# EAGLE board d11_micro_std_vcp_v2 (EAGLE 7.3.0)
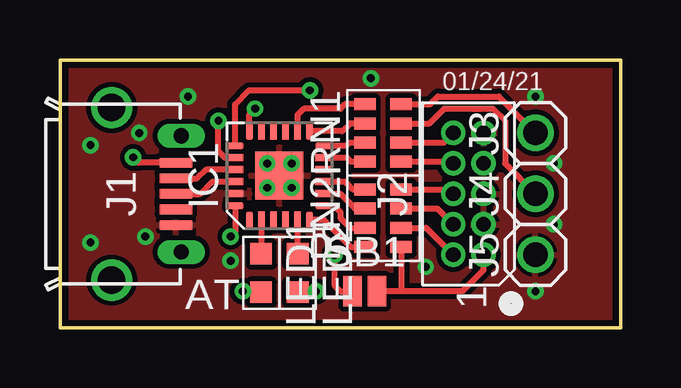
[diagram p0: board, top side]
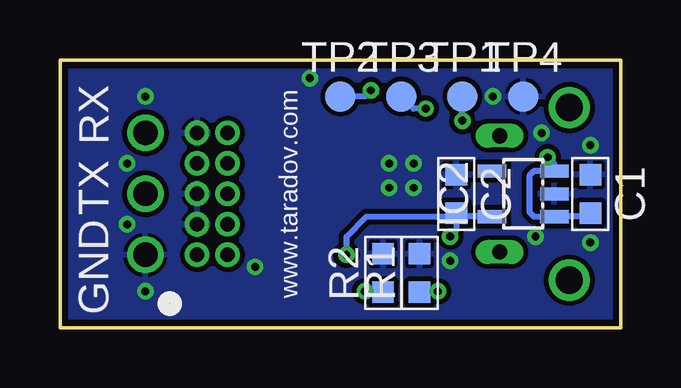
[diagram p1: board, bottom side, seen from below]

Size 23.37 x 11.18 mm. Coordinates in mm from the lower left corner, seen from the top.
Outline: 0,0 23.37,0 23.37,11.18 0,11.18 0,0
Copper layers (1*16): Top 0.0356mm / dielectric 1.5011mm / Bottom 0.0356mm
Design rules "std-tented-new": minimum track width 8mil, minimum drill 13mil, track to track 6mil, track to pad 6mil, pad to pad 6mil, via to via 6mil, smd to smd 0mil, copper to edge 10mil, drill to drill 6mil, minimum pad ring 7mil, minimum via ring 7mil, stop-mask expansion 3mil, vias tented up to drill 25mil, thermal gap 6mil

## Footprints (pad centres in the part's own frame; a part is rotated, then mirrored left to right if it is on the bottom)
SMD0603 = smd 0.9 x 0.9: 1 -0.8,0; 2 0.8,0
QFN24 = smd 0.7 x 0.28: 1 -1.85,1.25; 2 -1.85,0.75; 3 -1.85,0.25; 4 -1.85,-0.25; 5 -1.85,-0.75; 6 -1.85,-1.25; 13 1.85,-1.25; 14 1.85,-0.75; 15 1.85,-0.25; 16 1.85,0.25; 17 1.85,0.75; 18 1.85,1.25 | smd 0.28 x 0.7: 7 -1.25,-1.85; 8 -0.75,-1.85; 9 -0.25,-1.85; 10 0.25,-1.85; 11 0.75,-1.85; 12 1.25,-1.85; 19 1.25,1.85; 20 0.75,1.85; 21 0.25,1.85; 22 -0.25,1.85; 23 -0.75,1.85; 24 -1.25,1.85 | smd 2 x 2: PAD 0,0
SOT23-5 = smd 0.55 x 1.2: 1 -0.95,-1.3; 2 0,-1.3; 3 0.95,-1.3; 4 0.95,1.3; 5 -0.95,1.3
USB-B-MICRO-SMT-SHELL-TH = smd 1.35 x 0.4: 1 4.825,1.3; 2 4.825,0.65; 3 4.825,0; 4 4.825,-0.65; 5 4.825,-1.3 | drill 1.143: M1 2.15,-3.6; M2 2.15,3.6 | drill 0.635 long: M3 5.05,2.425; M4 5.05,-2.425
HEADER-5X2-1.27MM = drill 0.61 pad 1.016: 1 -2.54,-0.635; 2 -2.54,0.635; 3 -1.27,-0.635; 4 -1.27,0.635; 5 0,-0.635; 6 0,0.635; 7 1.27,-0.635; 8 1.27,0.635; 9 2.54,-0.635; 10 2.54,0.635
PIN-TH = drill 1.016: 1 0,0
SMD0603-X4 = smd 0.5 x 0.889: 1 -1.2,-0.752; 2 -0.4,-0.752; 3 0.4,-0.752; 4 1.2,-0.752; 5 1.2,0.752; 6 0.4,0.752; 7 -0.4,0.752; 8 -1.2,0.752
SB-1.27MM-NO = smd 0.762 x 1.27: 1 -0.508,0; 2 0.508,0
TP-1.27MM = smd 1.27 x 1.27: 1 0,0

## Placement (x,y rotation side)
C1  1uF  [SMD0603]  1.27,5.59 270 bottom
C2  1uF  [SMD0603]  6.86,5.59 270 bottom
IC1  ATSAMD11D  [QFN24]  9.14,6.35 90 top
IC2  MIC5504-3.3  [SOT23-5]  4.06,5.59 90 bottom
J1  [USB-B-MICRO-SMT-SHELL-TH]  0,5.59 0 top
J2  HEADER-5X2-TH-1.27  [HEADER-5X2-1.27MM]  17.02,5.59 90 top
J3  RX  [PIN-TH]  19.81,8.13 90 top
J4  TX  [PIN-TH]  19.81,5.59 90 top
J5  GND  [PIN-TH]  19.81,3.05 90 top
LED1  ORANGE  [SMD0603]  8.38,2.29 270 top
LED2  GREEN  [SMD0603]  9.91,2.29 270 top
R1  10K  [SMD0603]  8.38,2.29 90 bottom
R2  10K  [SMD0603]  9.91,2.29 90 bottom
RN1  100  [SMD0603-X4]  13.46,8.13 90 top
RN2  100  [SMD0603-X4]  13.46,4.57 90 top
SB1  [SB-1.27MM-NO]  12.7,1.52 0 top
TP1  SIO  [TP-1.27MM]  6.6,9.65 0 bottom
TP2  [TP-1.27MM]  11.68,9.65 0 bottom
TP3  [TP-1.27MM]  9.14,9.65 0 bottom
TP4  [TP-1.27MM]  4.06,9.65 0 bottom

## Library data of the parts
C1 C2 R1 R2 RN1 RN2 = ataradov_rlc
IC1 = ataradov_mcu
IC2 = ataradov_vreg
J1-J5 = ataradov_conn
LED1 LED2 = ataradov_led
SB1 TP1-TP4 = ataradov_misc

## Nets
+3V3: C2.2 IC1.24 IC2.5 SB1.1
GND: C1.1 C2.1 IC1.23 IC1.PAD IC2.2 J1.5 J2.3 J2.5 J2.9 J5.1 R1.2 R2.2 TP4.1
I_RESET: IC1.12 RN1.7
I_RX: IC1.14 RN1.5
I_SWCLK_TCK: IC1.8 RN2.6
I_SWDIO_TMS: IC1.7 RN2.7
I_TDI: IC1.11 RN1.8
I_TDO: IC1.9 RN2.5
I_TX: IC1.13 RN1.6
I_VREF: IC1.6 RN2.8
LED_A: IC1.2 LED1.1
LED_B: IC1.5 LED2.1
N$2: LED1.2 R1.1
N$3: LED2.2 R2.1
RESET: IC1.18 TP3.1
SWCLK: IC1.19 TP2.1
SWDIO: IC1.20 TP1.1
T_RESET: J2.10 RN1.2
T_SWCLK_TCK: J2.4 RN2.3
T_SWDIO_TMS: J2.2 RN2.2
T_TDI: J2.8 RN1.1
T_TDO: J2.6 RN2.4
T_VREF: J2.1 RN2.1 SB1.2
UART_RX: J3.1 RN1.4
UART_TX: J4.1 RN1.3
USB_DM: IC1.21 J1.2
USB_DP: IC1.22 J1.3
V_USB: C1.2 IC2.1 IC2.3 J1.1

## Tracks (layer width: path | path; a pad name or v marks a point on that pad's centre or on a via)
+3V3  (via drill 0.33)
  Top 0.254: IC1.24 7.29,3.99 v7.11,3.81 | v11.43,3.05 11.43,1.78 11.68,1.52 SB1.1
  Bottom 0.254: IC2.5 6.71,4.64 | 6.71,4.64 C2.2 6.86,4.06 v7.11,3.81 | v11.43,3.05 11.43,3.81 10.6,4.64 6.71,4.64
GND  (via drill 0.33 pad 0.25)
  Top 0.254: IC1.PAD v8.64,5.84
  other vias: 19.81,9.65 19.81,1.52 1.27,7.62 1.27,3.56 3.3,8.13 3.56,3.81 8.64,6.86 9.65,6.86 9.65,5.84 5.33,9.65 20.57,4.32 12.95,10.41 15.24,2.54 20.57,6.86 7.11,2.79
  pour Bottom (isolate 0.203): 0,11.18 23.37,11.18 23.37,0 0,0
  pour Top (isolate 0.203): 0,11.18 23.37,11.18 23.37,0 0,0
I_RESET
  Top 0.254: IC1.12 11.92,7.6 12.05,7.73 RN1.7
I_RX
  Top 0.254: RN1.5 11.87,9.33 11.68,9.14 10.16,9.14 9.89,8.88 IC1.14
I_SWCLK_TCK
  Top 0.254: IC1.8 11.67,5.6 12.3,4.97 RN2.6
I_SWDIO_TMS
  Top 0.254: IC1.7 11.41,5.1 11.68,4.83 11.68,4.57 12.08,4.17 RN2.7
I_TDI
  Top 0.254: IC1.11 11.95,7.1 12.12,6.93 RN1.8
I_TDO
  Top 0.254: IC1.9 11.87,6.1 12.2,5.77 RN2.5
I_TX
  Top 0.254: RN1.6 12.08,8.53 11.76,8.2 IC1.13
I_VREF
  Top 0.254: IC1.6 10.99,4.5 12.12,3.37 RN2.8
LED_A
  Top 0.254: IC1.2 8.39,3.1 LED1.1
LED_B
  Top 0.254: IC1.5 9.89,3.1 LED2.1
N$2  (via drill 0.33)
  Top 0.254: LED1.2 7.66,1.49 v7.62,1.52
  Bottom 0.254: LED1.2 7.66,1.49 v7.62,1.52
N$3  (via drill 0.33)
  Top 0.254: LED2.2 10.63,1.49 v10.67,1.52
  Bottom 0.254: LED2.2 10.63,1.49 v10.67,1.52
RESET  (via drill 0.33)
  Top 0.254: IC1.18 7.89,8.91 v8.13,9.14
  Bottom 0.254: v8.13,9.14 8.64,9.14 TP3.1
SWCLK  (via drill 0.33)
  Top 0.254: IC1.19 7.29,9.33 7.87,9.91 v10.41,9.91
  Bottom 0.254: v10.41,9.91 10.67,9.65 TP2.1
SWDIO  (via drill 0.33)
  Top 0.254: IC1.20 6.87,7.1 6.6,7.37 v6.6,8.64
  Bottom 0.254: v6.6,8.64 TP1.1
T_RESET
  Top 0.254: RN1.2 15.98,7.73 J2.10
T_SWCLK_TCK
  Top 0.254: RN2.3 15.73,4.97 J2.4
T_SWDIO_TMS
  Top 0.254: RN2.2 15.26,4.17 J2.2
T_TDI
  Top 0.254: RN1.1 16.31,6.93 J2.8
T_TDO
  Top 0.254: RN2.4 16.2,5.77 J2.6
T_VREF
  Top 0.254: 14.22,1.52 16.76,1.52 17.65,2.41 J2.1 | 14.22,1.52 SB1.2 | RN2.1 14.22,3.36 14.22,1.52
UART_RX
  Top 0.254: RN1.4 15.42,9.33 15.75,9.65 18.29,9.65 J3.1
UART_TX
  Top 0.254: RN1.3 15.39,8.53 16,9.14 18.03,9.14 18.54,8.64 18.54,6.86 J4.1
USB_DM
  Top 0.254: IC1.21 6.1,6.6 5.7,6.24 J1.2
USB_DP
  Top 0.254: J1.3 5.85,5.59 6.35,6.1 IC1.22
V_USB  (via drill 0.33)
  Top 0.254: J1.1 3.27,6.89 v3.05,7.11
  Bottom 0.254: IC2.1 3.62,4.64 3.81,4.83 3.81,6.35 3.62,6.54 IC2.3 2.76,6.83 v3.05,7.11 | IC2.1 2.79,4.61 | C1.2 1.42,4.64 IC2.1

## Text on the board
tPlace: 01/24/21 | AT | 1
bPlace: www.taradov.com